# Altium PCB Layout.PcbDoc
Units mm, origin at the board's own origin, x right, y up, seen from the top; angles counter-clockwise.
Board outline 99.06 x 99.58 mm, 2 copper layers (Top Layer, Bottom Layer); 60 components, 68 nets, 266 pads, 44 vias.
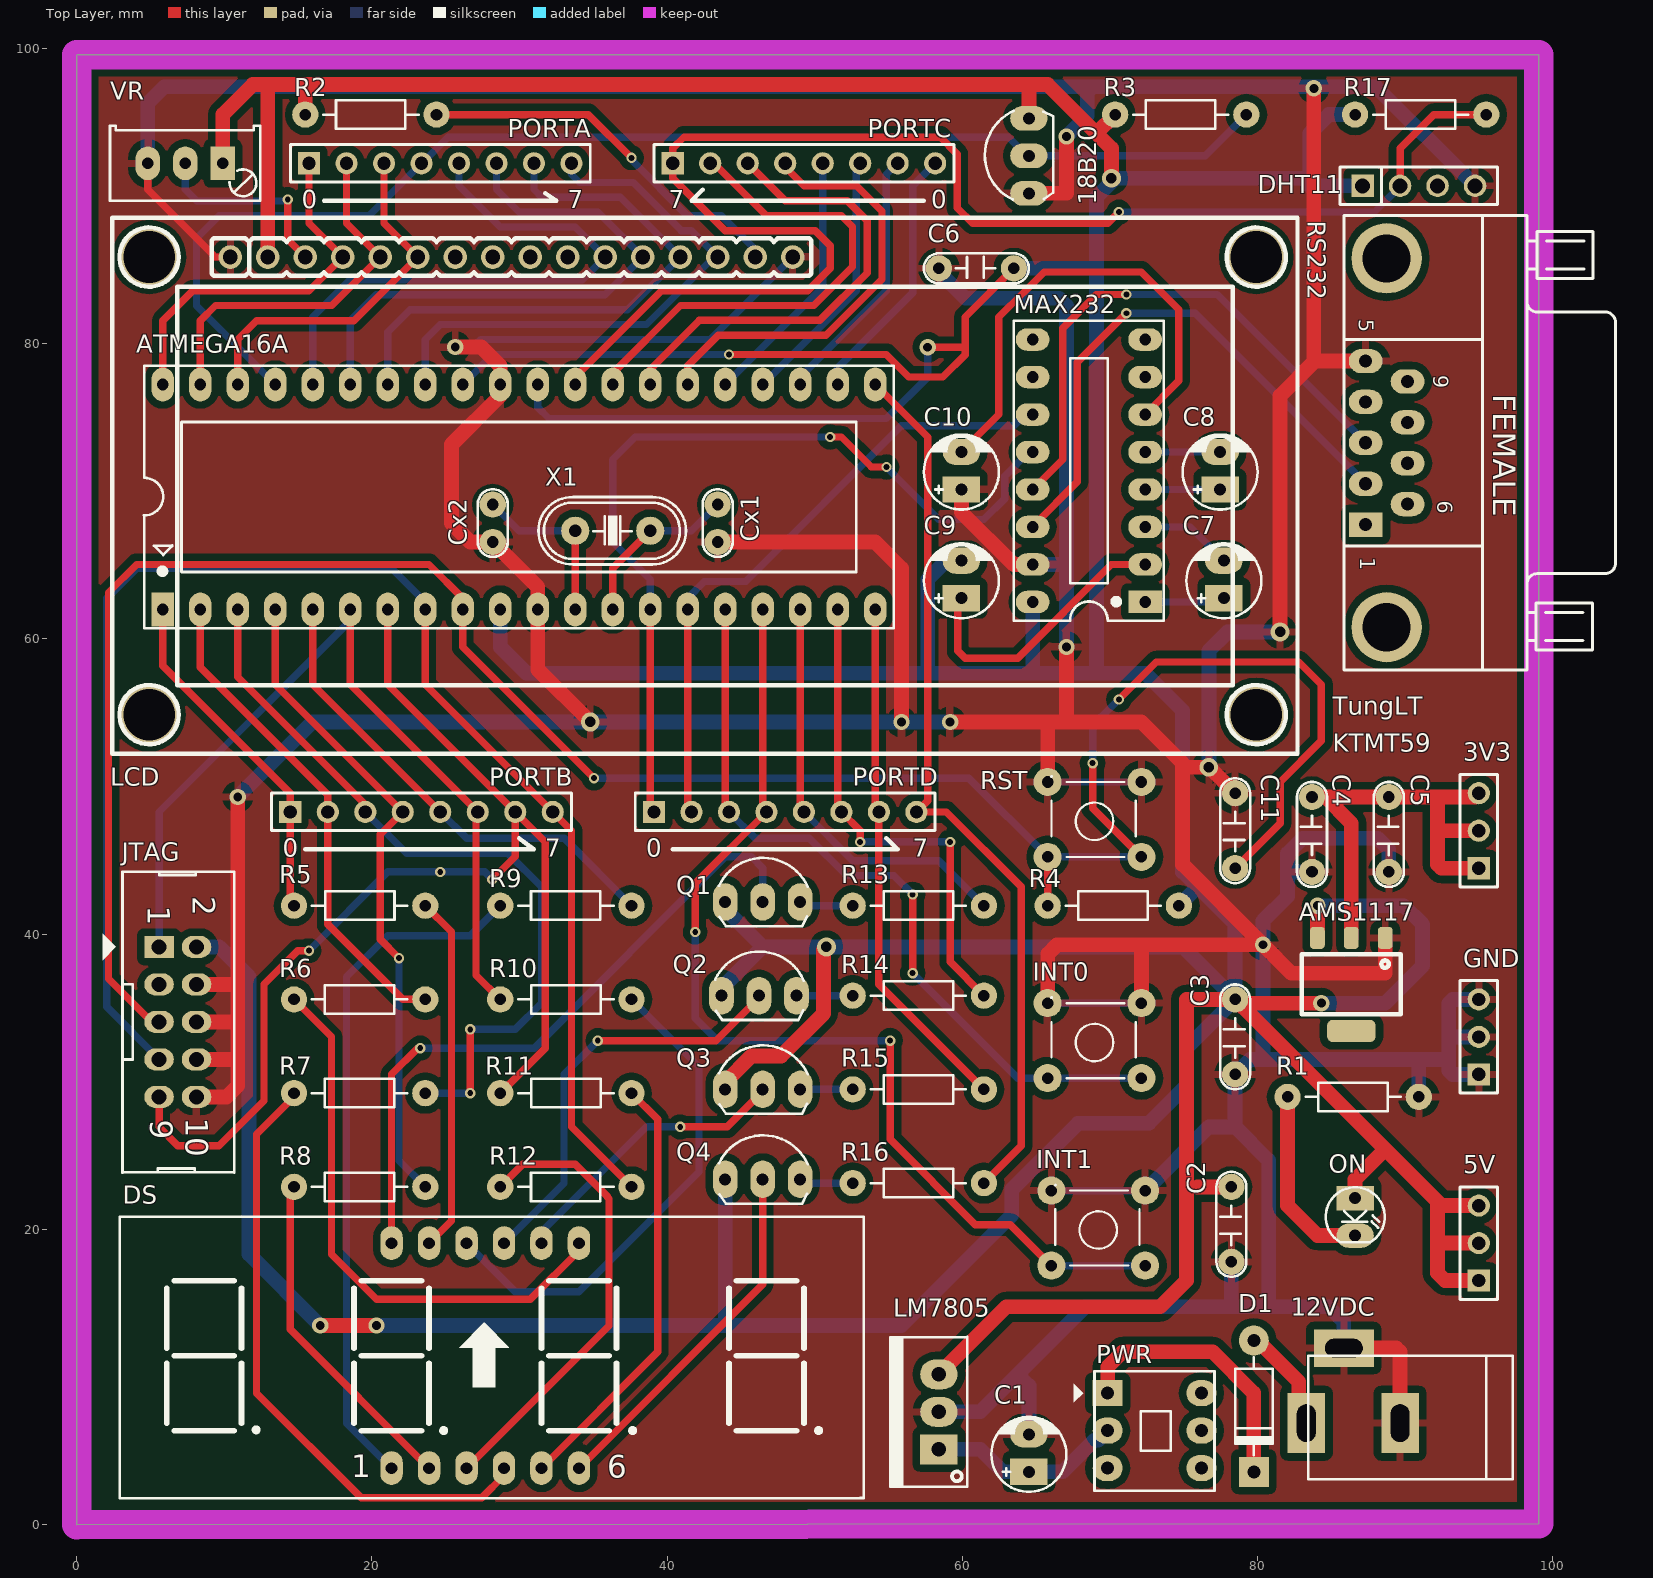
[diagram p0: Top Layer view]
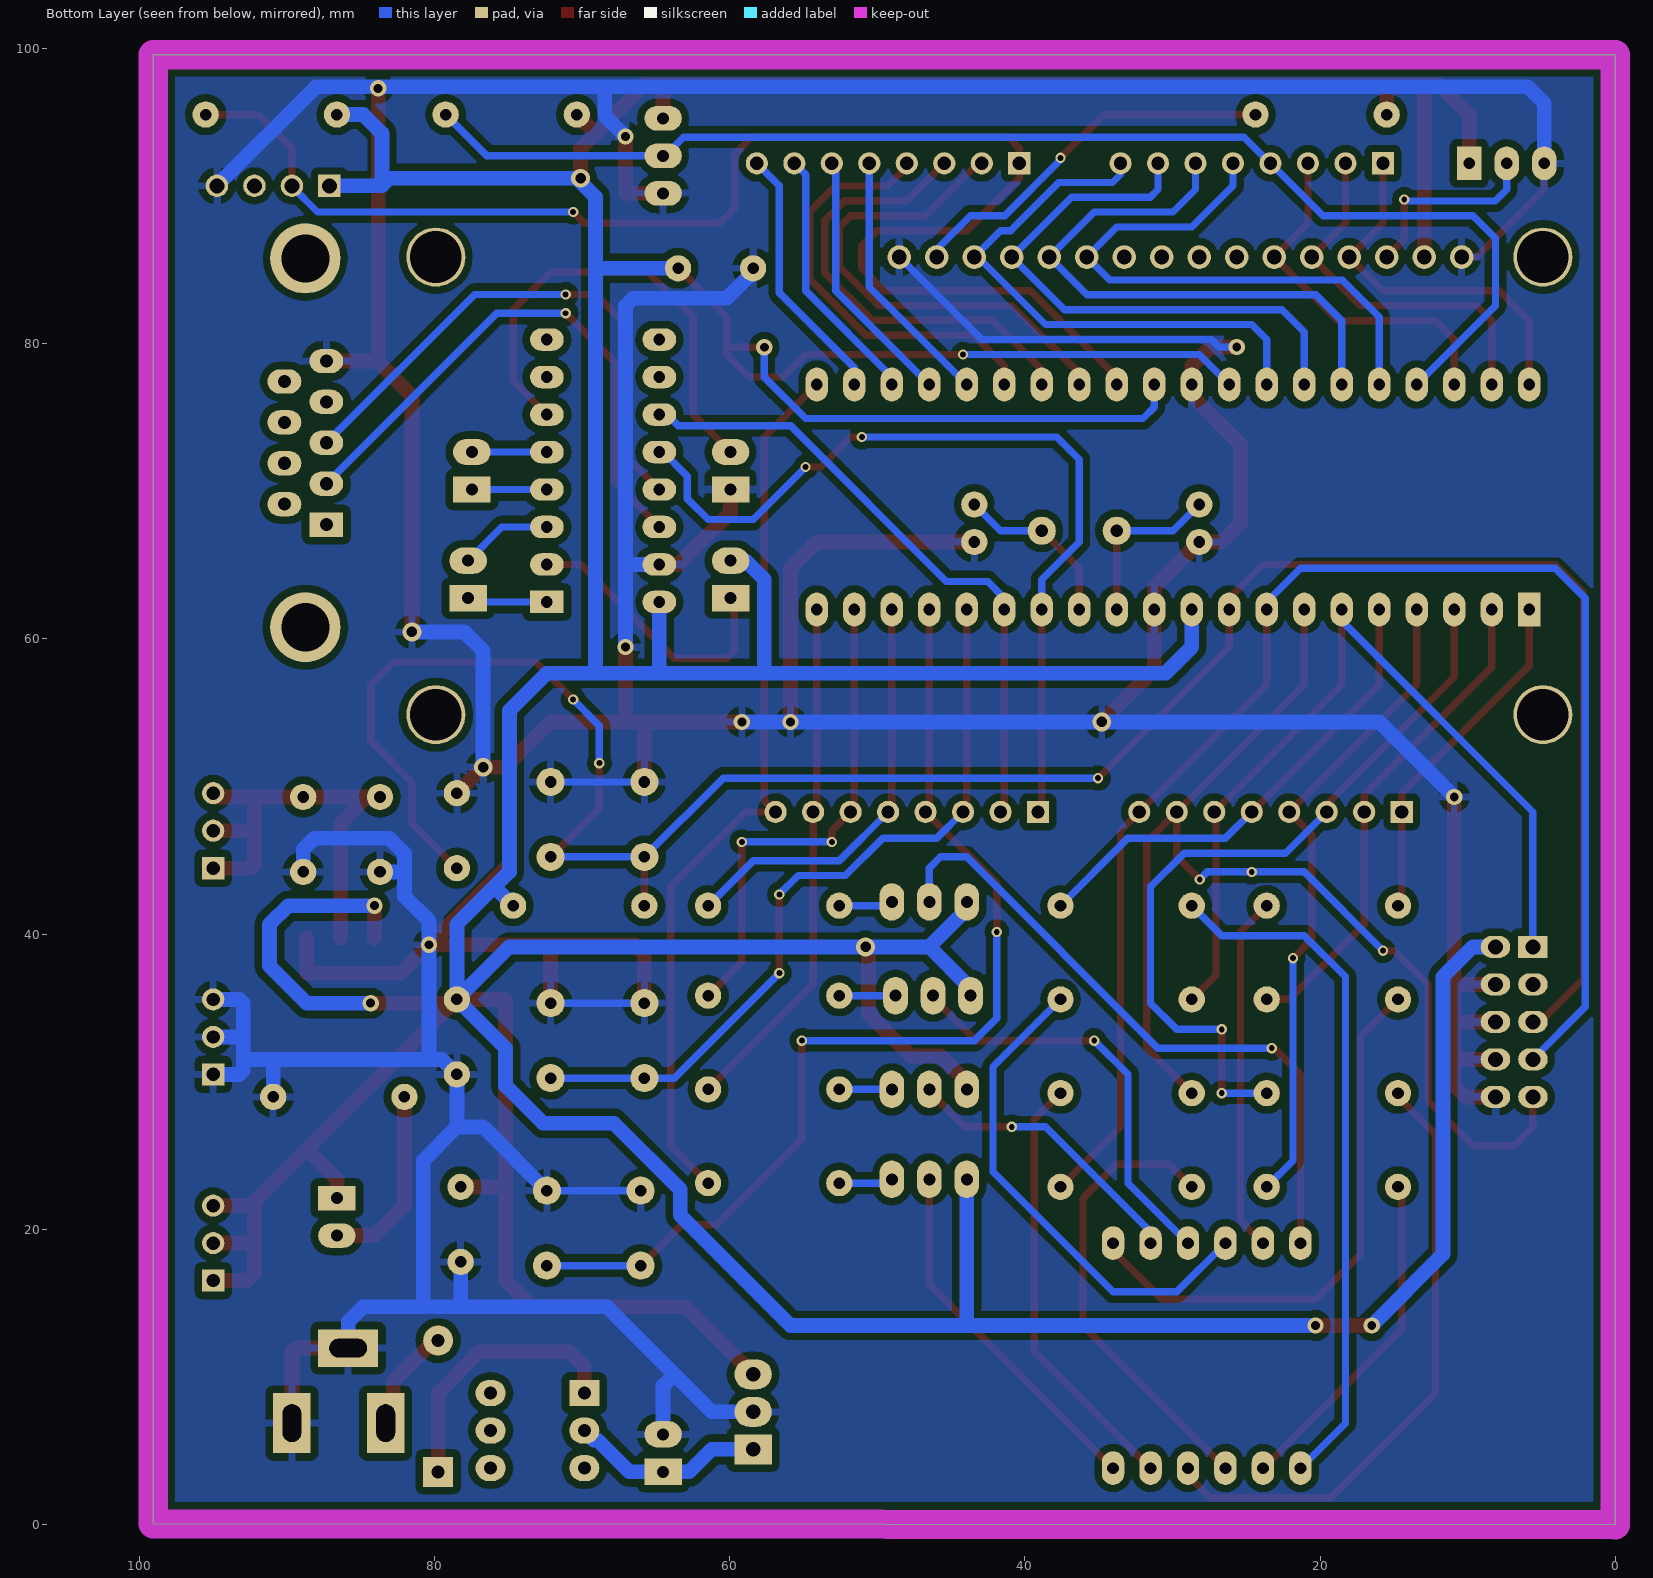
[diagram p1: Bottom Layer view, seen from below]

## Layer stack, top to bottom
Top Solder: solder mask 0.0102, Solder Resist, Dk 3.5
Top Layer: signal copper 0.0356
Dielectric 1: dielectric 0.32, FR-4, Dk 4.8
Bottom Layer: signal copper 0.0356
Bottom Solder: solder mask 0.0102, Solder Resist, Dk 3.5

## Board outline
0,0 0,99.582 99.06,99.582 99.06,0.052

## Design rules (kind name [scope] priority, off if disabled: settings)
Clearance [All] p1: gap=0.5 ignorepadtopadclearanceinfootprint=FALSE
PlaneClearance [All] p1: clearance=0.5
PlaneConnect [All] p1: planeconnectstyle=Relief reliefexpansion=0.5 reliefentries=4 reliefconductorwidth=0.5 reliefairgap=0.5
PolygonConnect [All] p1: connectstyle=Relief reliefconductorwidth=0.5 reliefentries=4 polygonreliefangle="90 Angle" airgapwidth=0.5
RoutingVias Via_Power [InNetClass('Net_Power')] p1: holewidth=0.6 width=1.1 viastyle="Through Hole" minholewidth=0.6 minwidth=1.1 maxholewidth=0.6 maxwidth=1.1
RoutingVias Via_Signal [InNetClass('Net_Signal')] p2: holewidth=0.4 width=0.7 viastyle="Through Hole" minholewidth=0.4 minwidth=0.7 maxholewidth=0.4 maxwidth=0.7
SolderMaskExpansion [All] p1: expansion=0.102
Width Net_Power [InNetClass('Net_Power')] p1: maxlimit=2 minlimit=0.5 preferedwidth=1
Width Net_Signal [InNetClass('Net_Signal')] p2: maxlimit=1 minlimit=0.5 preferedwidth=0.5
28 further rules are at their usual default settings.

## Classes and differential pairs
net class Net_Power: 3V3 GND VCC
net class Net_Signal: MISO MOSI Net12VDC_1 NetC1_1 NetC7_1 NetC7_2 NetC8_1 NetC8_2 NetC9_1 NetC10_2 NetD1_2 NetDS_1 NetDS_2 NetDS_3 NetDS_4 NetDS_5 NetDS_6 NetDS_7 NetDS_8 NetDS_9 NetDS_10 NetDS_11 NetDS_12 NetLCD_3 NetLCD_15 NetMAX232_13 NetMAX232_14 NetON_2 NetQ1_3 NetQ2_3 NetQ3_3 NetQ4_3 PA0 PA1 PA2 PA3 PA4 PA5 PA6 PA7 PB0 PB1 PB2 PB3 PB4 PC2 PC3 PC4 PC5 PC6 PC7 PD2 PD3 PD4 PD5 PD6 PD7 RESET RXD SCK SCL SDA TXD XTAL1 XTAL2

## Components (designator, comment, footprint, x,y, rotation, side; value= is the part's Value field where it differs from the comment)
3V3 "Header 3" HDR1X3 94.996,44.464 r90 top
5V "Header 3" HDR1X3 94.996,16.524 r90 top
12VDC "Jac DC" DC-IN 86.487,9.412 r180 top
18B20 "DS18B20" DS18S20 64.516,92.724 r90 top
AMS1117 "AMS1117-3V3" AMS1117-3.3V 86.36,36.59 r270 top
ATMEGA16A "ATMEL 16A" DIP40/W0.6 5.842,61.99 r0 top value="Atmega 16L"
C1 "100uF" CP1/2 64.516,3.57 r90 top value=10uF/50V
C2 "104" CN2 78.232,17.794 r90 top value=0.1uF
C3 "106" CN2 78.486,30.494 r90 top value=0.1uF
C4 "106" CN2 83.693,44.21 r90 top value=0.1uF
C5 "104" CN2 88.9,44.21 r90 top value=0.1uF
C6 "104" CN2 58.42,85.104 r0 top value=0,1uF/300V
C7 "1uF" CP1/2 77.724,62.752 r90 top value=10uF/50V
C8 "1uF" CP1/2 77.47,70.118 r90 top value=10uF/50V
C9 "1uF" CP1/2 59.944,62.752 r90 top value=10uF/50V
C10 "1uF" CP1/2 59.944,70.118 r90 top value=10uF/50V
C11 "104" CN2 78.486,44.464 r90 top value=0.1uF
Cx1 "22pF" CN1 43.434,66.562 r90 top value=33pF
Cx2 "22pF" CN1 28.194,66.562 r90 top value=33pF
D1 "1N4007" D1A 79.756,12.46 r90 top
DHT11 "DHT11" JP4-C1T 87.122,90.692 r0 top
DS "7SEGQ" LED7SEG-4-0.56 21.336,3.824 r0 top value="LED 7Q SEG"
GND "Header 3" HDR1X3 94.996,30.494 r90 top
INT0 "SW" SW4 72.136,30.24 r180 top value="Button chip 4 pin"
INT1 "SW" SW4 72.39,17.54 r180 top value="Button chip 4 pin"
JTAG "Header 5x2" Hed2X5 5.588,39.13 r270 top
LCD "LCD 16x2A" LCD16x2 10.414,85.866 r0 top value=LCD16x2A (schematic designator LCD1)
LM7805 "LM7805" QTO-220 58.42,5.094 r90 top
MAX232 "MAX232" DIP16/W0.3 72.39,62.498 r90 top
ON "LED" LED-3 86.614,22.112 r270 top value="LED 3 ly Single Colour"
PORTA "Header 8" HDR1X8 15.748,92.216 r0 top
PORTB "Header 8" HDR1X8 14.478,48.274 r0 top
PORTC "Header 8" HDR1X8 40.386,92.216 r0 top
PORTD "Header 8" HDR1X8 39.116,48.274 r0 top
PWR "SW6S" SW6 69.85,8.904 r0 top value=SW6
Q1 "A1015" QTO-92 46.482,42.178 r0 top
Q2 "A1015" QTO-92 46.228,35.828 r0 top
Q3 "A1015" QTO-92 46.482,29.478 r0 top
Q4 "A1015" QTO-92 46.482,23.382 r0 top
R1 "220" R1/4W 90.932,28.97 r180 top value="R1/4W - 1K"
R2 "220" R1/4W 24.384,95.518 r180 top value="R1/4W - 1K"
R3 "10k" R1/4W 79.248,95.518 r180 top value="R1/4W - 1K"
R4 "100k" R1/4W 74.676,41.924 r180 top value="R1/4W - 1K"
R5 "220" R1/4W 14.732,41.924 r0 top value="R1/4W - 1K"
R6 "220" R1/4W 23.622,35.574 r180 top value="R1/4W - 1K"
R7 "220" R1/4W 23.622,29.224 r180 top value="R1/4W - 1K"
R8 "220" R1/4W 23.622,22.874 r180 top value="R1/4W - 1K"
R9 "220" R1/4W 37.592,41.924 r180 top value="R1/4W - 1K"
R10 "220" R1/4W 28.702,35.574 r0 top value="R1/4W - 1K"
R11 "220" R1/4W 28.702,29.224 r0 top value="R1/4W - 1K"
R12 "220" R1/4W 37.592,22.874 r180 top value="R1/4W - 1K"
R13 "1k" R1/4W 52.578,41.924 r0 top value="R1/4W - 1K"
R14 "1k" R1/4W 52.578,35.828 r0 top value="R1/4W - 1K"
R15 "1k" R1/4W 52.578,29.478 r0 top value="R1/4W - 1K"
R16 "1k" R1/4W 52.578,23.128 r0 top value="R1/4W - 1K"
R17 "10k" R1/4W 95.504,95.518 r180 top value="R1/4W - 1K"
RS232 "RS232" "DSB 9-M" 88.75,73.281 r90 top
RST "SW" SW4 72.136,45.226 r180 top value="Button chip 4 pin"
VR "10K" VR1 9.906,92.216 r180 top value="VR 10K"
X1 "16MHz" XT2 36.322,67.324 r0 top value=4Mhz

## Footprints (in the part's own frame and the unit in brackets; to place one, negate y for a bottom-side part, rotate by r counter-clockwise, add the part's x,y. Pads: shape width x height; smd on the part's side, far side on the other; paste and mask are expansions set on the pad)
AMS1117-3.3V [mm] "SOT223, 4-Leads, Body 6.7x7.3mm (max), Pitch 2.30mm, IPC Medium Density"
  rrect50% 1.5x1 smd: 1(-3.15,2.3) 2(-3.15,0) 3(-3.15,-2.3)
  rrect50% 1.5x3.28 smd: 4(3.15,0)
  silkscreen extent -2.03,-3.35 2.03,3.35
CN1 [mil]
  round 70 hole 31: 1(0,0) 2(100,0)
  silkscreen extent -40,-40 141,40, body extent -60,-30 170,37, height 265
CN2 [mil]
  round 70 hole 31: 1(0,0) 2(200,0)
  silkscreen extent -40,-40 240,40, body extent -54,-44 260,55, height 407
CP1/2 [mil] "Tu hoa < 22uF/16>50V"
  rect 70x100 hole 32: 1(0,0)
  oval 70x100 hole 32: 2(100,0)
  silkscreen extent -53,-100 146,100, body extent -49,-99 149,99, height 287
D1A [mil] "Diode 1A, W 100mil, L 350mil"
  round 80 hole 35: 1(0,0)
  rect 80x80 hole 35: 2(-350,0)
  silkscreen extent -305,-50 -45,50, body extent -386,-33 34,36, height 84
DC-IN [mil] "Jac DC input"
  rect 100x160 hole 50 slot 100 at 90 deg: 1(125,100) 2(-125,100)
  rect 160x100 hole 50 slot 100 at 0 deg: 3(25,-100)
  silkscreen extent -425,-80 120,250, body extent -410,-105 134,269, height 434
DIP16/W0.3 [mil] "16 PIN, W 300mil, Pin to pin 100mil"
  rect 60x90 hole 31: 1(0,0)
  oval 60x90 hole 31: 2(100,0) 3(200,0) 4(300,0) 5(400,0) 6(500,0) 7(600,0) 8(700,0) 9(700,300) 10(600,300) 11(500,300) 12(400,300) 13(300,300) 14(200,300) 15(100,300) 16(0,300)
  silkscreen extent -50,-50 750,350, body extent -52,-57 752,356, height 299
DIP40/W0.6 [mil] "40 PIN, W 600mil, Pin to pin 100mil"
  rect 60x90 hole 31: 1(0,0)
  oval 60x90 hole 31: 2(100,0) 3(200,0) 4(300,0) 5(400,0) 6(500,0) 7(600,0) 8(700,0) 9(800,0) 10(900,0) 11(1000,0) 12(1100,0) 13(1200,0) 14(1300,0) 15(1400,0) 16(1500,0) 17(1600,0) 18(1700,0) 19(1800,0) 20(1900,0) 21(1900,600) 22(1800,600) 23(1700,600) 24(1600,600) 25(1500,600) 26(1400,600) 27(1300,600) 28(1200,600) 29(1100,600) 30(1000,600) 31(900,600) 32(800,600) 33(700,600) 34(600,600) 35(500,600) 36(400,600) 37(300,600) 38(200,600) 39(100,600) 40(0,600)
  silkscreen extent -50,-50 1950,650, body extent -82,-10 1982,600, height 224
DS18S20 [mil] "TO-92"
  oval 66x100 hole 32: 3(100,0) 4(0,0) 5(-100,0)
  silkscreen extent -117,-65 120,118
"DSB 9-M" [mil] "COM MALE D Subminiature; 9 Position; Right Angle; Pitch 1.385 mm"
  rect 65x90 hole 35: 1(-218.11,55.91)
  oval 65x90 hole 35: 2(-109.05,55.91) 3(0,55.91) 4(109.06,55.91) 5(218.11,55.91) 6(-163.58,-55.91) 7(-54.53,-55.91) 8(54.53,-55.91) 9(163.58,-55.91)
  round 187.4 hole 128.35: 10(491.93,0) 11(-491.93,0)
  silkscreen extent -606,-610 606,114, body extent -610,-637 606,138, height 495
HDR1X3 [mm] "Connector; Header; 3 Position"
  rect 1.5x1.5 hole 0.9: 1(0,0)
  round 1.5 hole 0.9: 2(2.54,0) 3(5.08,0)
  silkscreen extent -1.27,-1.27 6.35,1.27
HDR1X8 [mm] "Connector; Header; 8 Position"
  rect 1.5x1.5 hole 0.9: 1(0,0)
  round 1.5 hole 0.9: 2(2.54,0) 3(5.08,0) 4(7.62,0) 5(10.16,0) 6(12.7,0) 7(15.24,0) 8(17.78,0)
  silkscreen extent -1.27,-1.27 19.05,1.27
Hed2X5 [mm] "Header 10x2,20 pin, connecter"
  rect 1.5x2 hole 1: 1(0,0)
  oval 1.5x2 hole 1: 2(0,2.54) 3(2.54,0) 4(2.54,2.54) 5(5.08,0) 6(5.08,2.54) 7(7.62,0) 8(7.62,2.54) 9(10.16,0) 10(10.16,2.54)
  silkscreen extent -5.1,-3.81 15.29,5.11, body extent -5.17,-3.33 15.33,5.97, height 8.82
JP4-C1T [mm] "4 row, straight, gold plating"
  rect 1.52x1.52 hole 1.02: 1(0,0)
  round 1.52 hole 1.02: 2(2.54,0) 3(5.08,0) 4(7.62,0)
  silkscreen extent -1.52,-1.27 9.14,1.27, body extent -1.52,-1.25 9.14,1.25, height 8.51
LCD16x2 [mm] "LCD 16x2, 36.3mmx80.3mm"
  round 1.6 hole 1 mask+0.1: 1(0,0) 2(2.54,0) 3(5.08,0) 4(7.62,0) 5(10.16,0) 6(12.7,0) 7(15.24,0) 8(17.78,0) 9(20.32,0) 10(22.86,0) 11(25.4,0) 12(27.94,0) 13(30.48,0) 14(33.02,0) 15(35.56,0) 16(38.1,0)
  round 4 hole 3.5: Hole_0(-5.5,0) Hole_1(-5.5,-31) Hole_3(69.5,-31) Hole_4(69.5,0)
  silkscreen extent -8,-33.65 72.3,2.65, body extent -8.25,-33.75 72.25,2.75, height 10.52
LED7SEG-4-0.56 [mil]
  oval 60x90 hole 31: 1(0,0) 2(100,0) 3(200,0) 4(300,0) 5(400,0) 6(500,0) 7(500,600) 8(400,600) 9(300,600) 10(200,600) 11(100,600) 12(0,600)
  silkscreen extent -725,-80 1260,670, body extent -720,-80 1260,668, height 565
LED-3 [mil] "LED 2 PIN, 3ly Only colour"
  rect 65x100 hole 32: 1(0,0)
  oval 65x100 hole 32: 2(100,0)
  silkscreen extent -29,-78 118,79, body extent -25,-75 113,75, height 217
QTO-92 [mil] "TO-92"
  oval 66x100 hole 32: 1(-100,0) 2(0,0) 3(100,0)
  silkscreen extent -117,-65 120,118, body extent -109,-66 109,95, height 245
QTO-220 [mil] "TO-220 - 1-2-3"
  rect 80x100 hole 39: 1(0,0)
  oval 80x100 hole 39: 2(100,0) 3(200,0)
  silkscreen extent -100,-76 300,130, body extent -119,-64 322,121, height 755
R1/4W [mil] "R 1/4W, 2 Pin, 350mil"
  round 70 hole 31: 1(0,0) 2(350,0)
  silkscreen extent 48,-38 302,38, body extent -40,-47 386,47, height 111
SW4 [mil] "SW button 4pin, 250 x250 mil"
  round 75 hole 31: 1(0,0) 2(250,-200) 3(250,0) 4(0,-200)
  silkscreen extent 15,-215 240,0, body extent -36,-220 276,24, height 276
SW6 [mil] "SW DTDP - 6Pin 260x300x300 mil"
  rect 80x70 hole 35: 1(0,0)
  oval 80x70 hole 35: 2(0,-100) 3(0,-200) 4(250,-200) 5(250,-100) 6(250,0)
  silkscreen extent -90,-260 285,58, body extent -33,-259 281,55, height 532
VR1 [mil] "Variable Resistor"
  rect 65x90 hole 30: 1(0,0)
  oval 65x90 hole 30: 2(100,0) 3(200,0)
  silkscreen extent -100,-100 301,100, body extent -88,-130 288,110, height 455
XT2 [mil] "Footpin for Crystal 2 pin"
  round 75 hole 34: 1(-100,0) 2(100,0)
  silkscreen extent -198,-90 195,90, body extent -233,-93 213,90, height 138

## Part data
3V3 5V GND: library part Hed3, "Header 3 (Green)"
12VDC: library part DCIN, "Jac DC input"
18B20: library part DS18S20, "High Precision  1-Wire® Digital Thermometer"
AMS1117: "Linear Voltage Regulator 3.3V 1A 15V Max SOT-223", ComponentLink1Description=Datasheet, ComponentLink1URL="D:\Dropbox\Datasheets\Power Management ICs\Linear Regulators\AMS1117.pdf", Unit Price=0.2000
ATMEGA16A: library part ATmega16A-PU, "8-Bit AVR Microcontroller with 16K Bytes of In-System Programmable Flash Memory"
C1 C7 C8 C9 C10: library part CP1, "Cap P  0,1uF < 22uF , 16 - 50V", Description 1="10 => 220uF/6,3V/10V - 10uF => 100uF/16V", Description 2="0,1uF => 33uF/50V - 10uF => 22uF/63V", Description 3="0,47uF => 10uF/100V"
C2 C3 C4 C5 C11: library part CN2, "Cap np 104 => 105pF"
C6: library part CN, Designed by=VanDungEvn
Cx1 Cx2: library part CN0, "Cremic For Xtal 1pF => 100pF"
D1: library part D1A, "Diode 1A"
DHT11: Manufacturer="Würth Elektronik eiSos GmbH", partNo=613004143121, ComponentLink1 Description=Manufacturer, ComponentLink1URL=http://www.we-online.com, ComponentLink2 Description=Datasheet, ComponentLink2URL=http://katalog.we-online.de/em/datasheet/6130xx143121.pdf, Created by="Karrer Zheng", Created Date="29 March 2013", NoPins=04
DS: library part LED7SEG-4, "Four 7 Seg Dipslay"
INT0 INT1 RST: library part SW4, "Switch button 4 pin"
JTAG: library part HED5x2
LCD: library part LCD16x2A, "LCD dipslay 16 char, 2 line"
LM7805: library part LM78xx, "On ap +, from + 5 to + 24VDC", =LM7808
MAX232: "Dual EIA-232 Driver/Receiver"
ON: "LED Single colour Green and Red"
PORTA PORTB PORTC PORTD: library part HED8V, "Header 8 Vit Broad"
PWR: "SW-DTDP - 6 Pin"
Q1 Q2 Q3 Q4: "PNP 600mW, ECB", =A1013
R1 R2 R3 R4 R5 R6 R7 R8 R9 R10 R11 R12 R13 R14 R15 R16 R17: library part R1/4W, "Resistor 1/4W"
RS232: library part COM
VR: library part VR, "Var Resistor"
X1: library part XT2, "Crystal For all Crystal 2pin."

## Via types
v1: diameter 0.7, hole 0.4, Top Layer to Bottom Layer, 26 vias
v2: diameter 1.1, hole 0.6, Top Layer to Bottom Layer, 13 vias
v3: diameter 1.27, hole 0.711, Top Layer to Bottom Layer, 5 vias

## Nets (pads, with @x,y where several pads share a name; then routed paths per layer and width w, separated by ;. In a path a pad name is that pad's centre, name@x,y a point inside that pad or via, vN(x,y) a via of type N, cw(c..) or ccw(c..) an arc to the next point about the centre after c; other vN are vias at no path point)
3V3: 3V3.1 3V3.2 3V3.3 AMS1117.2 C4.2 C5.2 | length 32
  Top Layer w1: C4.2 84.582,49.29 ; AMS1117.2 86.36,47.512 84.582,49.29 ; 3V3.1 92.456,44.464 92.202,44.718 92.202,47.004 ; 3V3.2 92.202,47.004 ; 3V3.3 94.742,49.29 92.202,49.29 ; 84.582,49.29 C5.2 92.202,49.29 ; 92.202,47.004 92.202,49.29
GND: 12VDC.2 12VDC.3 18B20.5 AMS1117.1 ATMEGA16A.11 ATMEGA16A.31 C1.2 C2.1 C3.1 C4.1 C5.1 C6.1 C10.1 C11.2 Cx1.1 Cx2.1 DHT11.4 GND.1 GND.2 GND.3 INT0.2 INT0.4 INT1.2 INT1.4 JTAG.4 JTAG.6 JTAG.8 JTAG.10 LCD.1 LCD.16 LM7805.2 MAX232.15 R1.1 RS232.5 RST.2 RST.4 VR.3 | length 603.4
  Top Layer w0.5: VR.3 4.826,90.438 9.398,85.866 LCD.1 ; 65.532,54.37 65.786,54.116
  Top Layer w1: JTAG.10 10.16,28.97 10.922,29.732 10.922,31.51 ; JTAG.8 10.922,31.51 ; JTAG.6 10.922,34.05 ; JTAG.4 10.922,36.59 ; v2(10.922,49.29) 10.922,36.59 ; v2(25.654,79.77) 27.418,79.77 28.702,78.486 ATMEGA16A.31 28.702,76.468 25.4,73.166 25.4,67.832 26.67,66.562 Cx2.1 31.242,63.514 ATMEGA16A.11 31.242,57.926 v3(34.798,54.37) ; Cx1.1 54.102,66.562 55.88,64.784 v2(55.88,54.37) ; v2(59.182,54.37) 65.532,54.37 67.056,54.37 ; C10.1 59.944,68.58 63.486,65.038 MAX232.15 ; 18B20.5 67.056,90.184 v2(67.056,94.024) ; INT0.2 65.786,38.642 66.417,39.273 72.136,39.273 INT0.4 ; RST.2 65.786,54.116 ; v2(67.056,59.45) 67.056,54.37 ; 72.39,39.273 v2(80.375,39.273) ; C11.2 76.722,51.308 v3(76.708,51.308) 74.93,51.308 ; v3(81.534,60.466) 81.534,76.468 83.887,78.821 ; v2(83.82,97.296) 83.82,78.888 83.887,78.821 ; 12VDC.3 89.408,11.952 89.662,11.698 12VDC.2 ; RS232.5 83.887,78.821 ; AMS1117.1 88.66,37.352 82.296,37.352 v2(80.375,39.273) ; 10.922,31.51 10.922,34.05 ; 10.922,34.05 10.922,36.59 ; 67.056,54.37 72.122,54.37 74.93,51.562 74.93,51.308 ; 74.93,51.308 74.93,44.718 v2(80.375,39.273)
  Bottom Layer w0.5: v2(25.654,79.77) 26.864,79.77 27.372,80.278 42.926,80.278 LCD.16 ; INT0.2 INT0.4 ; RST.2 RST.4 ; INT1.2 INT1.4
  Bottom Layer w1: VR.3 4.826,96.28 5.953,97.407 68.834,97.407 ; v2(10.922,49.29) 16.002,54.37 v3(34.798,54.37) v2(55.88,54.37) v2(59.182,54.37) ; LM7805.2 61.214,7.634 63.754,10.174 ; C6.1 58.42,84.85 60.198,83.072 66.548,83.072 67.056,82.564 67.056,65.038 ; C1.2 64.516,9.412 63.754,10.174 ; MAX232.15 67.056,65.038 ; v2(67.056,59.45) 67.056,65.038 ; v2(67.056,94.024) 68.469,95.437 68.469,97.042 68.834,97.407 ; INT1.4 76.708,26.938 78.486,26.938 ; v3(76.708,51.308) 76.708,59.196 77.978,60.466 v3(81.534,60.466) ; C2.1 78.232,14.746 ; C4.1 82.042,44.21 ; 12VDC.3 85.852,13.73 84.836,14.746 80.772,14.746 ; C5.1 88.9,45.734 88.138,46.496 83.058,46.496 82.042,45.48 82.042,44.21 ; R1.1 90.932,31.51 ; DHT11.4 88.027,97.407 83.931,97.407 v2(83.82,97.296) 83.709,97.407 68.834,97.407 ; GND.1 93.218,30.494 92.964,30.748 92.964,31.51 ; GND.2 92.964,33.034 ; GND.3 93.218,35.574 92.964,35.32 92.964,33.034 ; 63.754,10.174 68.326,14.746 78.232,14.746 ; 78.232,14.746 80.772,14.746 ; 78.486,26.938 C3.1 79.502,31.51 80.264,31.51 ; 78.486,26.938 80.772,24.652 80.772,14.746 ; 80.264,31.51 80.375,31.621 v2(80.375,39.273) 80.375,40.892 82.042,42.559 82.042,44.21 ; 80.264,31.51 90.932,31.51 ; 90.932,31.51 92.964,31.51 ; 92.964,31.51 92.964,33.034
MISO: ATMEGA16A.7 JTAG.9 PORTB.7 R11.1 | length 81.4
  Top Layer w0.5: JTAG.9 5.588,26.938 6.858,25.668 9.652,25.668 12.7,28.716 12.7,36.59 14.986,38.876 v1(15.748,38.876) ; ATMEGA16A.7 21.082,56.91 PORTB.7 ; v1@28.064,43.702 v1(28.163,43.702) 29.718,45.257 PORTB.7 ; R11.1 31.75,32.272 31.75,46.242 PORTB.7
  Bottom Layer w0.5: v1(15.748,38.876) 21.082,44.21 v1(24.638,44.21) 27.654,44.21 v1(28.163,43.702)
MOSI: ATMEGA16A.6 JTAG.1 PORTB.6 R10.1 | length 59
  Top Layer w0.5: ATMEGA16A.6 18.542,56.91 PORTB.6 27.063,48.274 27.063,37.213 R10.1
  Bottom Layer w0.5: JTAG.1 5.588,48.274 18.542,61.228 ATMEGA16A.6
Net12VDC_1: 12VDC.1 D1.1 | length 7.2
  Top Layer w1: D1.1 80.01,12.46 82.804,9.666 82.804,7.38 12VDC.1
NetC1_1: C1.1 LM7805.1 PWR.2 | length 13.2
  Bottom Layer w1: LM7805.1 61.214,5.094 62.738,3.57 C1.1 66.798,3.57 68.941,5.713 69.199,5.713 PWR.2
NetC7_1: C7.1 MAX232.1 | length 5.4
  Bottom Layer w0.5: MAX232.1 77.47,62.498 C7.1
NetC7_2: C7.2 MAX232.3 | length 6.3
  Bottom Layer w0.5: MAX232.3 75.438,67.578 C7.2
NetC8_1: C8.1 MAX232.4 | length 5.1
  Bottom Layer w0.5: MAX232.4 C8.1
NetC8_2: C8.2 MAX232.5 | length 5.1
  Bottom Layer w0.5: MAX232.5 C8.2
NetC9_1: C9.1 MAX232.2 | length 19.2
  Top Layer w0.5: C9.1 59.69,62.498 59.69,59.196 60.198,58.688 63.754,58.688 70.104,65.038 MAX232.2
NetC10_2: C10.2 MAX232.6 | length 32.8
  Top Layer w0.5: C10.2 62.484,75.198 62.484,81.802 64.147,83.465 64.179,83.465 65.564,84.85 72.136,84.85 74.676,82.31 74.676,77.484 MAX232.6
NetD1_2: D1.2 PWR.1 | length 18.6
  Top Layer w1: PWR.1 69.85,10.682 70.866,11.698 76.962,11.698 79.756,8.904 D1.2
NetDS_1: DS.1 R9.2 | length 46.9
  Bottom Layer w0.5: DS.1 18.288,6.872 18.288,37.098 21.082,39.892 26.67,39.892 R9.2
NetDS_2: DS.2 R8.2 | length 23
  Top Layer w0.5: R8.2 14.478,22.62 14.478,13.222 DS.2
NetDS_3: DS.3 R12.2 | length 31.2
  Top Layer w0.5: DS.3 36.068,13.476 36.068,22.081 35.953,22.196 35.953,22.227 33.782,24.398 30.226,24.398 R12.2
NetDS_4: DS.4 R7.2 | length 42.2
  Top Layer w0.5: R7.2 14.732,28.97 12.192,26.43 12.192,8.898 19.288,1.802 27.442,1.802 28.956,3.316 DS.4
NetDS_5: DS.5 R11.2 | length 29.4
  Top Layer w0.5: DS.5 39.37,11.698 39.37,27.446 R11.2
NetDS_6: DS.6 Q4.2 | length 24.7
  Top Layer w0.5: DS.6 46.482,16.27 Q4.2
NetDS_7: DS.7 R6.2 | length 38.2
  Top Layer w0.5: R6.2 17.272,33.034 17.272,18.302 20.32,15.254 30.734,15.254 34.036,18.556 DS.7
NetDS_8: DS.8 Q3.2 | length 20.1
  Top Layer w0.5: v1(40.894,26.938) 44.08,26.938 46.482,29.341 Q3.2
  Bottom Layer w0.5: DS.8 31.496,19.826 38.608,26.938 v1(40.894,26.938) ; Q3.2@46.482,29.224 Q3.2
NetDS_9: DS.9 Q2.2 | length 28.6
  Top Layer w0.5: v1(35.306,32.78) 43.318,32.78 46.228,35.691 Q2.2
  Bottom Layer w0.5: DS.9 33.02,23.128 33.02,30.494 v1(35.306,32.78)
NetDS_10: DS.10 R10.2 | length 34.1
  Bottom Layer w0.5: DS.10 29.718,15.762 34.036,15.762 42.164,23.89 42.164,31.002 R10.2
NetDS_11: DS.11 R5.2 | length 25
  Top Layer w0.5: R5.2 25.4,40.146 25.4,20.588 DS.11 DS.11@23.876,19.826
NetDS_12: DS.12 Q1.2 | length 46.1
  Top Layer w0.5: DS.12 21.336,30.494 23.114,32.272 v1(23.282,32.272) ; Q1.2@46.228,41.416 46.228,41.924 Q1.2
  Bottom Layer w0.5: v1(23.282,32.272) 31.002,32.272 43.956,45.226 45.72,45.226 46.482,44.464 Q1.2
NetLCD_3: LCD.3 VR.2 | length 13.5
  Top Layer w0.5: v1(14.304,89.76) 14.304,87.056 LCD.3
  Bottom Layer w0.5: VR.2 7.366,90.438 8.144,89.66 14.204,89.66 v1(14.304,89.76)
NetLCD_15: LCD.15 R2.1 | length 26
  Top Layer w0.5: R2.1 34.661,95.518 v1(37.592,92.587)
  Bottom Layer w0.5: v1(37.592,92.587) 37.592,92.45 41.381,88.66 43.688,88.66 45.974,86.374 LCD.15
NetMAX232_13: MAX232.13 RS232.3 | length 37.4
  Top Layer w0.5: MAX232.13 66.802,72.15 66.802,81.04 69.088,83.326 v1(71.12,83.326)
  Bottom Layer w0.5: v1(71.12,83.326) 77.285,83.326 RS232.3
NetMAX232_14: MAX232.14 RS232.2 | length 37.9
  Top Layer w0.5: MAX232.14@64.887,67.716 67.802,70.631 67.802,78.738 v1(71.12,82.056)
  Bottom Layer w0.5: v1(71.12,82.056) 75.785,82.056 RS232.2
NetON_2: ON.2 R1.2 | length 12.8
  Top Layer w1: R1.2 82.042,21.604 84.074,19.572 ON.2
NetQ1_3: Q1.3 R13.1 | length 4
  Top Layer w0.5: Q1.3 Q1.3@49.276,41.924
  Bottom Layer w0.5: Q1.3 49.276,41.924 R13.1
NetQ2_3: Q2.3 R14.1 | length 4.2
  Top Layer w0.5: Q2.3 Q2.3@49.022,35.574
  Bottom Layer w0.5: Q2.3 R14.1
NetQ3_3: Q3.3 R15.1 | length 4.3
  Top Layer w0.5: Q3.3 Q3.3@49.53,28.97
  Bottom Layer w0.5: Q3.3 R15.1
NetQ4_3: Q4.3 R16.1 | length 4
  Top Layer w0.5: Q4.3 Q4.3@49.276,23.128
  Bottom Layer w0.5: Q4.3 49.276,23.128 R16.1
PA0: ATMEGA16A.40 LCD.4 PORTA.1 | length 25.6
  Top Layer w0.5: ATMEGA16A.40 5.842,81.548 7.874,83.58 15.748,83.58 LCD.4 15.748,88.152 PORTA.1
PA1: ATMEGA16A.39 LCD.5 PORTA.2 | length 25.6
  Top Layer w0.5: ATMEGA16A.39 8.382,81.548 9.414,82.58 17.288,82.58 LCD.5 18.288,88.152 PORTA.2
PA2: ATMEGA16A.38 LCD.6 PORTA.3 | length 24.9
  Top Layer w0.5: ATMEGA16A.38 10.922,80.278 12.192,81.548 18.796,81.548 LCD.6 20.828,88.152 PORTA.3
PA3: 18B20.4 ATMEGA16A.37 PORTA.4 R3.1 | length 87.8
  Bottom Layer w0.5: ATMEGA16A.37 8.128,82.564 8.128,87.136 9.652,88.66 19.812,88.66 PORTA.4 23.4,92.216 25.178,93.994 63.108,93.994 64.378,92.724 18B20.4 76.454,92.724 R3.1
PA4: ATMEGA16A.36 LCD.11 PORTA.5 | length 39.5
  Bottom Layer w0.5: ATMEGA16A.36 16.002,81.802 18.51,84.31 34.258,84.31 LCD.11 33.782,87.898 28.702,87.898 25.908,90.692 PORTA.5
PA5: ATMEGA16A.35 LCD.12 PORTA.6 | length 39.5
  Bottom Layer w0.5: ATMEGA16A.35 18.542,81.548 20.304,83.31 35.798,83.31 LCD.12 35.306,88.914 29.972,88.914 28.448,90.438 PORTA.6
PA6: ATMEGA16A.34 LCD.13 PORTA.7 | length 39
  Bottom Layer w0.5: ATMEGA16A.34 21.082,80.786 22.592,82.296 37.324,82.296 LCD.13 36.846,89.914 31.512,89.914 30.988,90.438 PORTA.7
PA7: ATMEGA16A.33 LCD.14 PORTA.8 | length 38.2
  Bottom Layer w0.5: ATMEGA16A.33 23.622,80.278 24.638,81.294 38.608,81.294 43.18,85.866 LCD.14 41.64,87.66 40.967,87.66 37.713,90.914 34.068,90.914 33.528,91.454 PORTA.8
PB0: ATMEGA16A.1 PORTB.1 R5.1 | length 23.7
  Top Layer w0.5: ATMEGA16A.1 5.842,58.18 14.478,49.544 PORTB.1 14.478,42.178 R5.1
PB1: ATMEGA16A.2 PORTB.2 R6.1 | length 33.6
  Top Layer w0.5: ATMEGA16A.2 8.382,58.071 17.018,49.435 PORTB.2 17.018,40.654 22.098,35.574 R6.1
PB2: ATMEGA16A.3 PORTB.3 R7.1 | length 52.1
  Top Layer w0.5: ATMEGA16A.3 10.922,57.418 19.558,48.782 PORTB.3 ; v1(26.67,29.224) v1(26.67,33.542)
  Bottom Layer w0.5: PORTB.3 22.352,45.48 29.21,45.48 31.496,43.194 31.496,35.32 29.718,33.542 v1(26.67,33.542) ; R7.1 v1(26.67,29.224)
PB3: ATMEGA16A.4 PORTB.4 R8.1 | length 44.6
  Top Layer w0.5: ATMEGA16A.4 13.462,56.91 PORTB.4 20.574,46.75 20.574,39.638 v1(21.844,38.368)
  Bottom Layer w0.5: v1(21.844,38.368) 21.844,24.652 R8.1
PB4: ATMEGA16A.5 PORTB.5 R9.1 | length 32.9
  Top Layer w0.5: ATMEGA16A.5 16.002,56.91 PORTB.5
  Bottom Layer w0.5: PORTB.5 26.432,46.48 33.036,46.48 R9.1
PC2: ATMEGA16A.24 PORTC.6 | length 17.7
  Bottom Layer w0.5: ATMEGA16A.24 52.832,83.58 52.832,91.962 PORTC.6
PC3: ATMEGA16A.25 PORTC.5 | length 17.7
  Bottom Layer w0.5: ATMEGA16A.25 50.546,83.834 PORTC.5
PC4: ATMEGA16A.26 PORTC.4 | length 29.5
  Top Layer w0.5: ATMEGA16A.26 41.402,78.5 43.482,80.58 50.773,80.58 54.562,84.37 54.562,88.962 52.848,90.676 49.292,90.676 48.006,91.962 PORTC.4
PC5: ATMEGA16A.27 PORTC.3 | length 31.7
  Top Layer w0.5: ATMEGA16A.27 38.862,78.246 42.196,81.58 50.358,81.58 53.562,84.784 53.562,88.329 52.214,89.676 48.006,89.676 PORTC.3
PC6: ATMEGA16A.28 PORTC.2 | length 34.1
  Top Layer w0.5: ATMEGA16A.28 36.322,77.992 40.91,82.58 49.944,82.58 52.562,85.198 52.562,87.914 51.816,88.66 46.736,88.66 43.18,92.216 PORTC.2
PC7: ATMEGA16A.29 DHT11.2 PORTC.1 R17.1 | length 101.5
  Top Layer w0.5: ATMEGA16A.29 33.782,77.738 39.624,83.58 49.53,83.58 51.054,85.104 51.054,86.628 50.038,87.644 43.942,87.644 40.386,91.2 PORTC.1 40.386,93.232 41.148,93.994 58.509,93.994 59.666,92.838 59.666,89.192 60.706,88.152 69.85,88.152 v1(70.612,88.914) ; DHT11.2 89.662,93.232 91.948,95.518 R17.1
  Bottom Layer w0.5: v1(70.612,88.914) 87.925,88.914 89.662,90.652 DHT11.2
PD2: ATMEGA16A.16 INT0.1 INT0.3 PORTD.3 | length 52.4
  Top Layer w0.5: ATMEGA16A.16 43.942,48.528 PORTD.3 ; v1(56.642,37.352) v1(56.642,42.686)
  Bottom Layer w0.5: PORTD.3 45.974,46.496 49.64,46.496 52.164,43.972 55.356,43.972 v1(56.642,42.686) ; v1(56.642,37.352) 63.754,30.24 INT0.3 INT0.1
PD3: ATMEGA16A.17 INT1.1 INT1.3 PORTD.4 | length 71.1
  Top Layer w0.5: v1(41.91,40.146) 41.91,43.448 PORTD.4 46.482,48.528 ATMEGA16A.17 ; v1(55.118,32.78) 55.118,26.091 60.889,20.32 63.26,20.32 INT1.3
  Bottom Layer w0.5: v1(41.91,40.146) 41.91,34.304 43.434,32.78 v1(55.118,32.78) ; INT1.3 INT1.1
PD4: ATMEGA16A.18 PORTD.5 R13.2 | length 28.6
  Top Layer w0.5: ATMEGA16A.18 49.022,48.528 PORTD.5
  Bottom Layer w0.5: PORTD.5 52.578,44.972 58.42,44.972 R13.2
PD5: ATMEGA16A.19 PORTD.6 R14.2 | length 33.8
  Top Layer w0.5: ATMEGA16A.19 51.562,48.528 PORTD.6 53.086,47.004 v1(53.086,46.242) ; v1(59.182,46.242) 59.182,38.114 R14.2
  Bottom Layer w0.5: v1(53.086,46.242) v1(59.182,46.242)
PD6: ATMEGA16A.20 PORTD.7 R15.2 | length 35.6
  Top Layer w0.5: ATMEGA16A.20 54.102,48.528 PORTD.7 54.356,36.59 R15.2
PD7: ATMEGA16A.21 PORTD.8 R16.2 | length 61.1
  Top Layer w0.5: ATMEGA16A.21 57.658,73.674 57.658,49.036 PORTD.8 58.928,48.274 64.008,43.194 64.008,25.668 R16.2
RESET: ATMEGA16A.9 C11.1 JTAG.5 R4.2 RST.1 RST.3 | length 158
  Top Layer w0.5: JTAG.5 5.08,34.05 2.164,36.966 2.164,63.138 4.064,65.038 23.876,65.038 26.162,62.752 ATMEGA16A.9 26.162,59.45 v1(35.052,50.56) ; R4.2 RST.3 ; v1(68.834,51.576) 68.834,48.528 RST.1 ; v1(70.612,55.894) 73.152,58.434 82.804,58.434 84.328,56.91 84.328,53.1 81.534,50.306 81.534,47.512 C11.1
  Bottom Layer w0.5: v1(35.052,50.56) 60.452,50.56 RST.3 RST.1 ; v1(68.834,51.576) 68.834,54.116 v1(70.612,55.894)
RXD: ATMEGA16A.14 MAX232.12 PORTD.1 | length 59.2
  Top Layer w0.5: ATMEGA16A.14 38.862,48.528 PORTD.1 ; v1(51.054,73.674) 51.816,73.674 53.848,71.642 v1(54.864,71.642)
  Bottom Layer w0.5: ATMEGA16A.14 38.862,64.022 36.322,66.562 36.322,72.15 37.846,73.674 v1(51.054,73.674) ; v1(54.864,71.642) 58.42,68.086 61.468,68.086 62.877,69.495 62.877,71.019 64.516,72.658 MAX232.12
SCK: ATMEGA16A.8 JTAG.7 PORTB.8 R12.1 | length 101.5
  Top Layer w0.5: ATMEGA16A.8 23.622,56.91 PORTB.8 33.528,47.004 33.528,26.938 R12.1
  Bottom Layer w0.5: JTAG.7 2.032,35.066 2.032,62.752 4.064,64.784 21.336,64.784 23.622,62.498 ATMEGA16A.8
SCL: ATMEGA16A.22 PORTC.8 | length 17.7
  Bottom Layer w0.5: ATMEGA16A.22 51.562,78.356 56.642,83.436 56.642,90.692 PORTC.8
SDA: ATMEGA16A.23 PORTC.7 | length 17.7
  Bottom Layer w0.5: ATMEGA16A.23 49.022,77.738 54.864,83.58 54.864,91.454 PORTC.7
TXD: ATMEGA16A.15 MAX232.11 PORTD.2 | length 43.1
  Top Layer w0.5: ATMEGA16A.15 41.402,48.528 PORTD.2
  Bottom Layer w0.5: ATMEGA16A.15 41.402,62.752 42.533,63.883 45.327,63.883 55.88,74.436 63.5,74.436 64.262,75.198 MAX232.11
VCC: 5V.1 5V.2 5V.3 18B20.3 AMS1117.3 ATMEGA16A.10 ATMEGA16A.30 ATMEGA16A.32 C2.2 C3.2 C6.2 C9.2 DHT11.1 JTAG.2 LCD.2 LM7805.3 MAX232.16 ON.1 Q1.1 Q2.1 Q3.1 Q4.1 R2.2 R3.2 R4.1 R17.2 VR.1 | length 591
  Top Layer w0.5: v1(44.196,79.262) 54.864,79.262 56.388,77.738 58.688,77.738 60.198,79.248 60.198,79.756 ; v2(57.658,79.756) 60.198,79.756 ; C6.2 60.198,81.802 60.198,79.756
  Top Layer w1: VR.1 9.906,95.518 11.938,97.55 12.954,97.55 ; LCD.2 12.954,97.55 ; R2.2 15.494,97.55 ; v2(16.51,13.476) v2(20.32,13.476) ; Q3.1 43.942,29.97 45.721,31.748 47.736,31.748 50.606,34.619 50.606,38.937 v3(50.8,39.13) ; LM7805.3 62.992,14.746 73.406,14.746 75.184,16.524 75.184,35.574 C3.2 78.486,35.32 v2(84.328,35.32) ; 18B20.3 64.516,97.55 ; v3(70.104,91.2) 70.104,93.232 69.088,94.248 ; R3.2 69.088,94.248 ; 75.946,22.874 C2.2 ; C3.2@78.994,35.066 88.646,25.414 ; AMS1117.3 84.06,41.91 v2(84.074,41.924) ; ON.1 86.614,23.382 88.646,25.414 ; 5V.1 92.71,16.524 92.202,17.032 92.202,19.064 ; 5V.2 92.202,19.064 ; 5V.3 92.456,21.604 92.202,21.858 ; 12.954,97.55 15.494,97.55 ; 15.494,97.55 64.516,97.55 ; 64.516,97.55 65.786,97.55 69.088,94.248 ; 88.646,25.414 92.202,21.858 ; 92.202,19.064 92.202,21.858
  Bottom Layer w0.5: ATMEGA16A.32 28.194,79.262 v1(44.196,79.262) ; ATMEGA16A.30 31.242,75.692 32.004,74.93 54.864,74.93 57.658,77.724 v2(57.658,79.756)
  Bottom Layer w1: JTAG.2 9.652,39.13 11.684,37.098 11.684,18.302 v2(16.51,13.476) ; v2(20.32,13.476) 43.688,13.476 ; ATMEGA16A.10 28.702,59.45 30.48,57.672 57.658,57.672 ; Q2.1 43.688,36.32 46.499,39.13 ; Q4.1 43.942,13.73 43.688,13.476 ; Q1.1 43.942,41.687 46.499,39.13 ; C9.2 58.911,65.292 57.658,64.04 57.658,57.672 ; C6.2 69.088,85.104 ; MAX232.16 64.77,57.672 ; R4.1 75.946,43.194 ; v2(84.074,41.924) 89.916,41.924 91.186,40.654 91.186,37.86 88.646,35.32 v2(84.328,35.32) ; R17.2 84.836,95.518 83.566,94.248 83.566,90.692 ; DHT11.1 83.566,90.692 ; 43.688,13.476 55.88,13.476 63.357,20.953 63.357,22.699 67.851,27.192 72.644,27.192 75.184,29.732 75.184,32.272 C3.2 ; 46.499,39.13 v3(50.8,39.13) 74.93,39.13 C3.2 ; 57.658,57.672 64.77,57.672 ; 64.77,57.672 69.088,57.672 ; 69.088,57.672 72.39,57.672 74.93,55.132 74.93,44.21 75.946,43.194 ; 69.088,57.672 69.088,85.104 ; 69.088,85.104 69.088,89.93 70.104,90.946 v3(70.104,91.2) 83.058,91.2 83.566,90.692 ; 75.946,43.194 78.486,40.654 C3.2
XTAL1: ATMEGA16A.13 Cx1.2 X1.2 | length 11.7
  Top Layer w0.5: ATMEGA16A.13 36.322,64.784 X1.2
  Bottom Layer w0.5: X1.2 41.656,67.324 Cx1.2
XTAL2: ATMEGA16A.12 Cx2.2 X1.1 | length 11.7
  Top Layer w0.5: ATMEGA16A.12 X1.1
  Bottom Layer w0.5: Cx2.2 29.972,67.324 X1.1
pads on no net: AMS1117.4 DHT11.3 JTAG.3 LCD.7 LCD.8 LCD.9 LCD.10 LCD.Hole_0 LCD.Hole_1 LCD.Hole_3 LCD.Hole_4 MAX232.7 MAX232.8 MAX232.9 MAX232.10 PWR.3 PWR.4 PWR.5 PWR.6 RS232.1 RS232.4 RS232.6 RS232.7 RS232.8 RS232.9 RS232.10 RS232.11

## Polygon pours and split planes (outlines as drawn)
GND on Top Layer "Top Layer-No Net" (solid, remove dead copper, pour order 0): 0,99.582 99.06,99.582 99.06,0.052 0.052,0.052 0,0
GND on Bottom Layer "Bottom Layer-No Net" (solid, remove dead copper, pour order 2): 0,99.582 99.06,99.582 99.06,0.052 99.008,0 0,0

## Keep-outs
Keep-Out Layer:
  the board outline again, w2

## Silkscreen, mask and mechanical layers (free items; w line width, h text height)
Top Overlay:
  lines w0.3: 15.494,45.734 30.988,45.734 29.972,46.496 ; 16.764,89.676 32.512,89.676 31.75,90.184 ; 40.386,45.734 55.626,45.734 54.864,46.496 ; 42.418,90.438 41.656,89.676 57.404,89.676
  text "0" at 15.24,89.168 h1.2
  text "7" at 33.274,89.168 h1.2
  text "7" at 40.132,89.168 h1.2
  text "0" at 57.912,89.168 h1.2
  text "TungLT" at 85.09,54.864 h1.2
  text "KTMT59" at 85.09,52.338 h1.2
  text "0" at 13.97,45.226 h1.2
  text "7" at 31.75,45.226 h1.2
  text "0" at 38.608,45.226 h1.2
  text "7" at 56.642,45.226 h1.2

## Dimensions
0,0 to 99.06,0.052 on Mechanical 10
0,0 to 0,99.582 on Mechanical 10

## Text inside footprints (layer, text, board x,y; h text height)
AMS1117: Mechanical 1 "1" at 88.88,38.165 h1.2 r180; Mechanical 1 "2" at 86.675,38.165 h1.2 r180; Mechanical 1 "3" at 84.47,38.165 h1.2 r180
DS: Top Overlay "6" at 35.941,3.164 h1.52; Top Overlay "1" at 18.593,3.215 h1.52
JTAG: Top Overlay "10" at 7.391,27.548 h1.52 r270; Top Overlay "9" at 4.978,27.421 h1.52 r270; Top Overlay "2" at 7.874,42.559 h1.52 r270; Top Overlay "1" at 4.838,41.905 h1.52 r270
LCD: Mechanical 1 "1" at 10.264,85.466 h1.2; Mechanical 1 "16" at 47.964,85.466 h1.2
RS232: Top Overlay "6" at 92.179,69.344 h1.02 r270; Top Overlay "9" at 91.925,77.853 h1.02 r270; Top Overlay "5" at 86.845,81.663 h1.02 r270; Top Overlay "1" at 86.972,65.534 h1.02 r270; Top Overlay "FEMALE" at 95.989,76.583 h1.52 r270